# Altium PCB ArduinoUltrassonico.PcbDoc
Units mm, origin at the board's own origin, x right, y up, seen from the top; angles counter-clockwise.
Board outline 95.63 x 59.94 mm, 2 copper layers (Top Layer, Bottom Layer); 46 components, 40 nets, 151 pads, 8 vias.
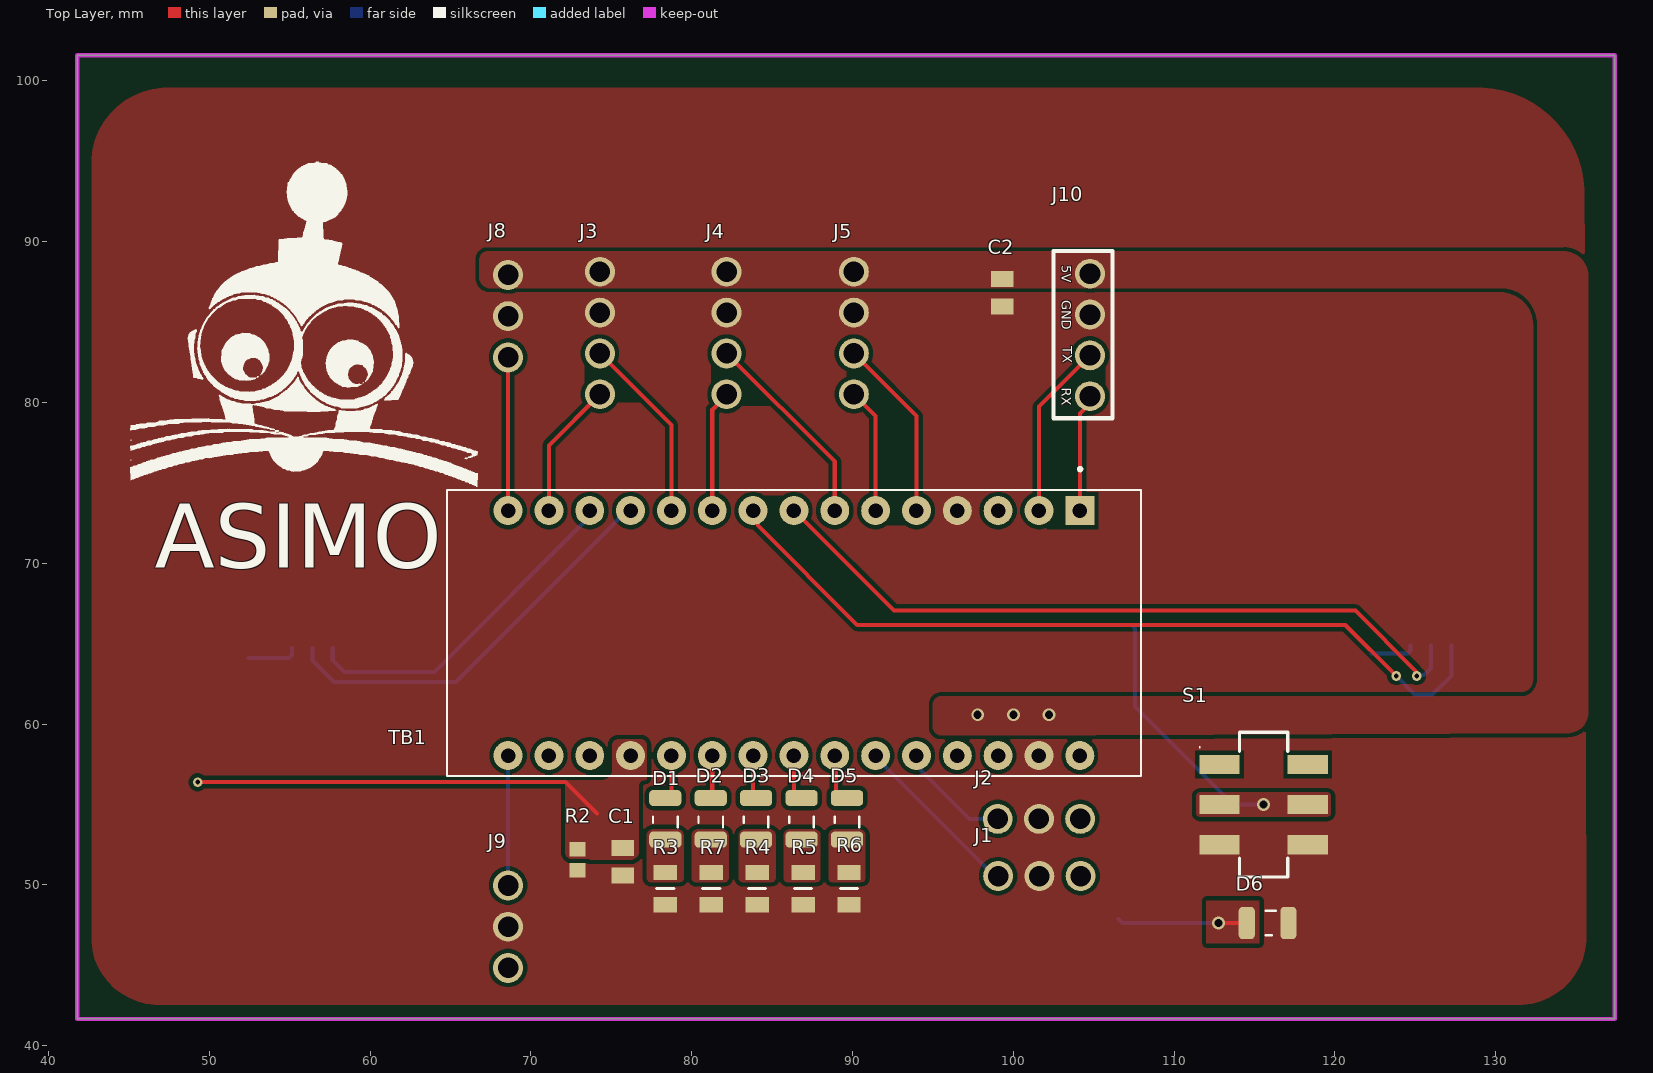
[diagram p0: Top Layer view]
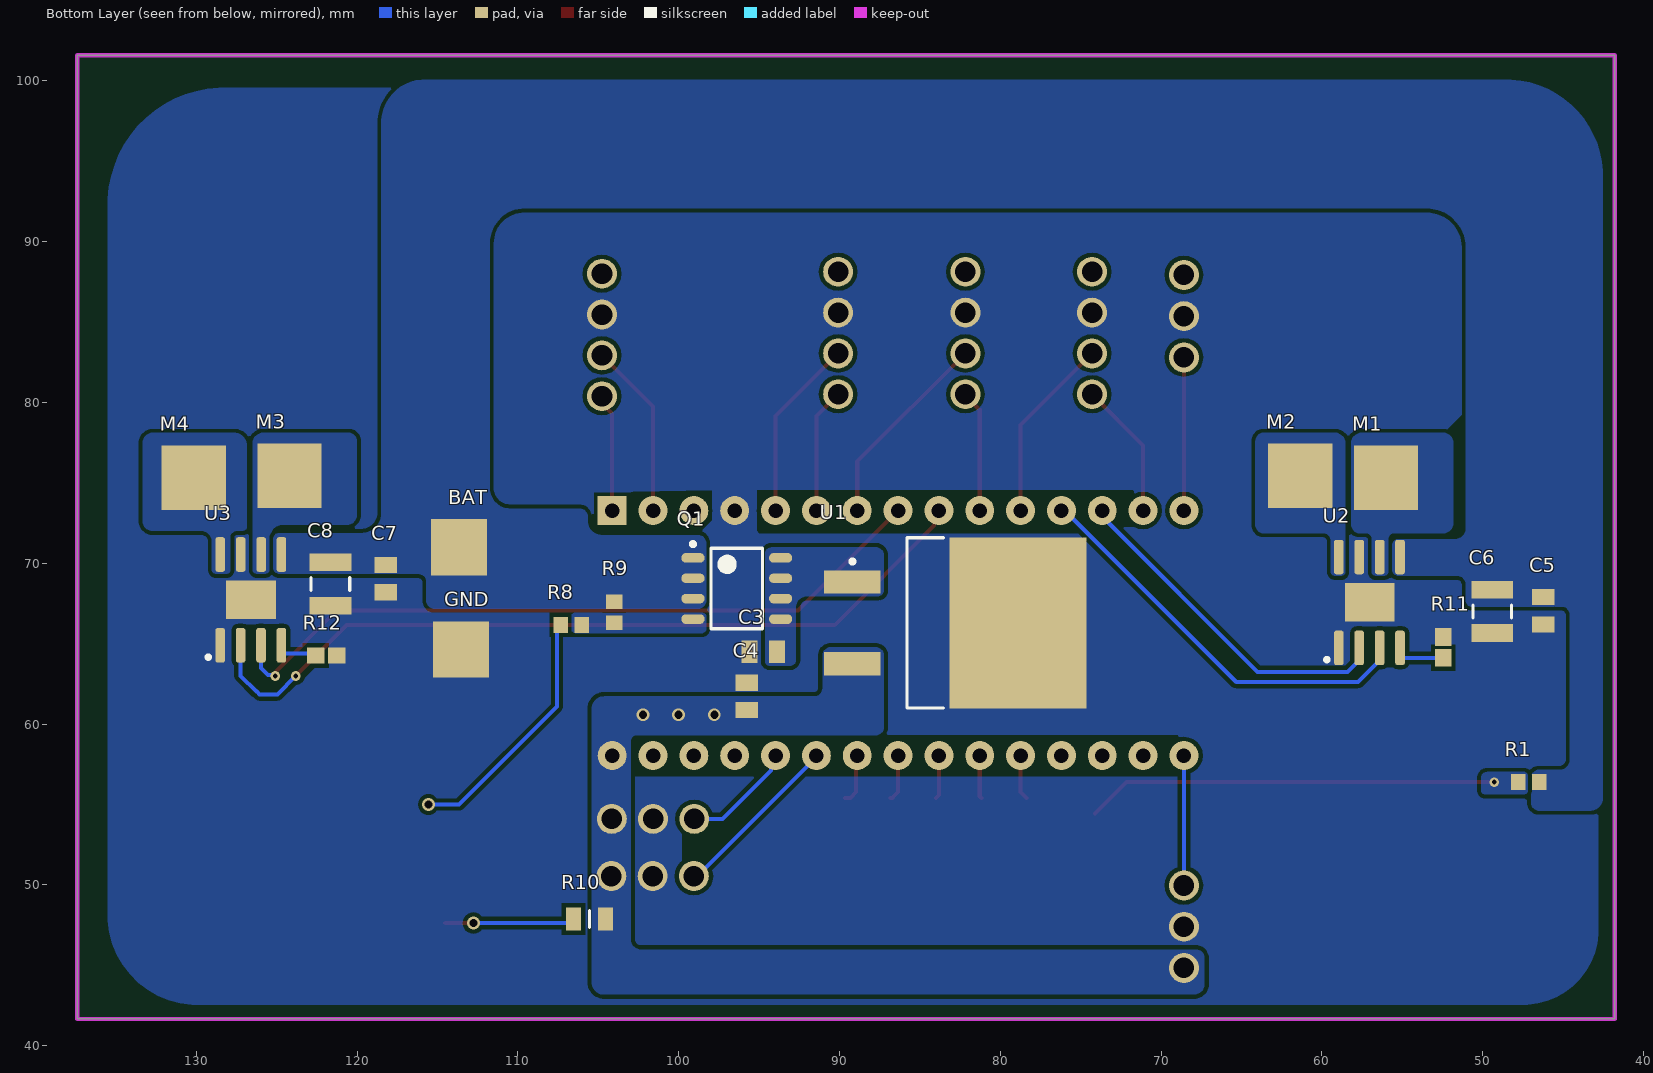
[diagram p1: Bottom Layer view, seen from below]
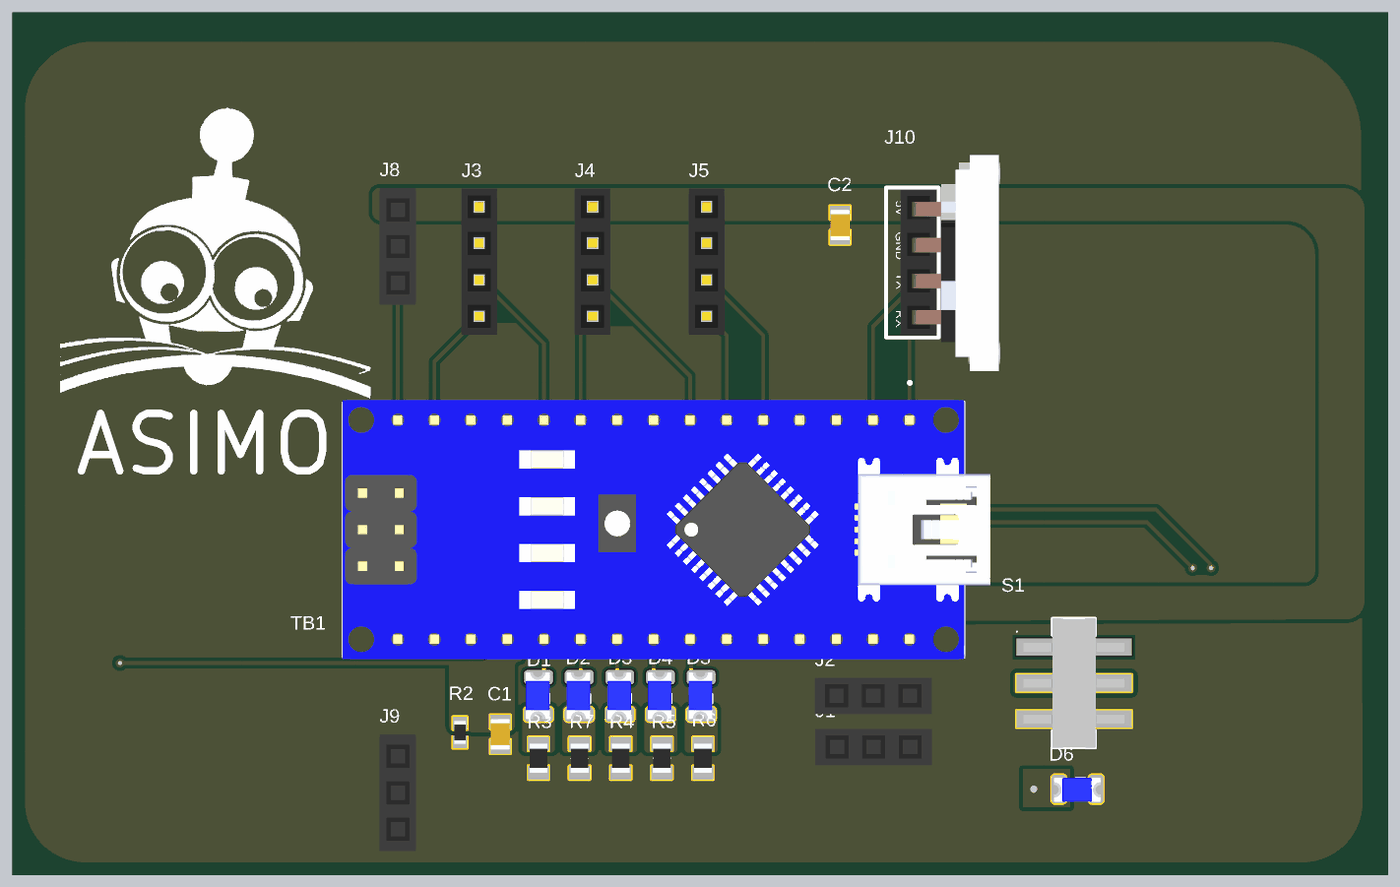
[diagram p2: 3D render of the assembled board from above, using the file's embedded part models]
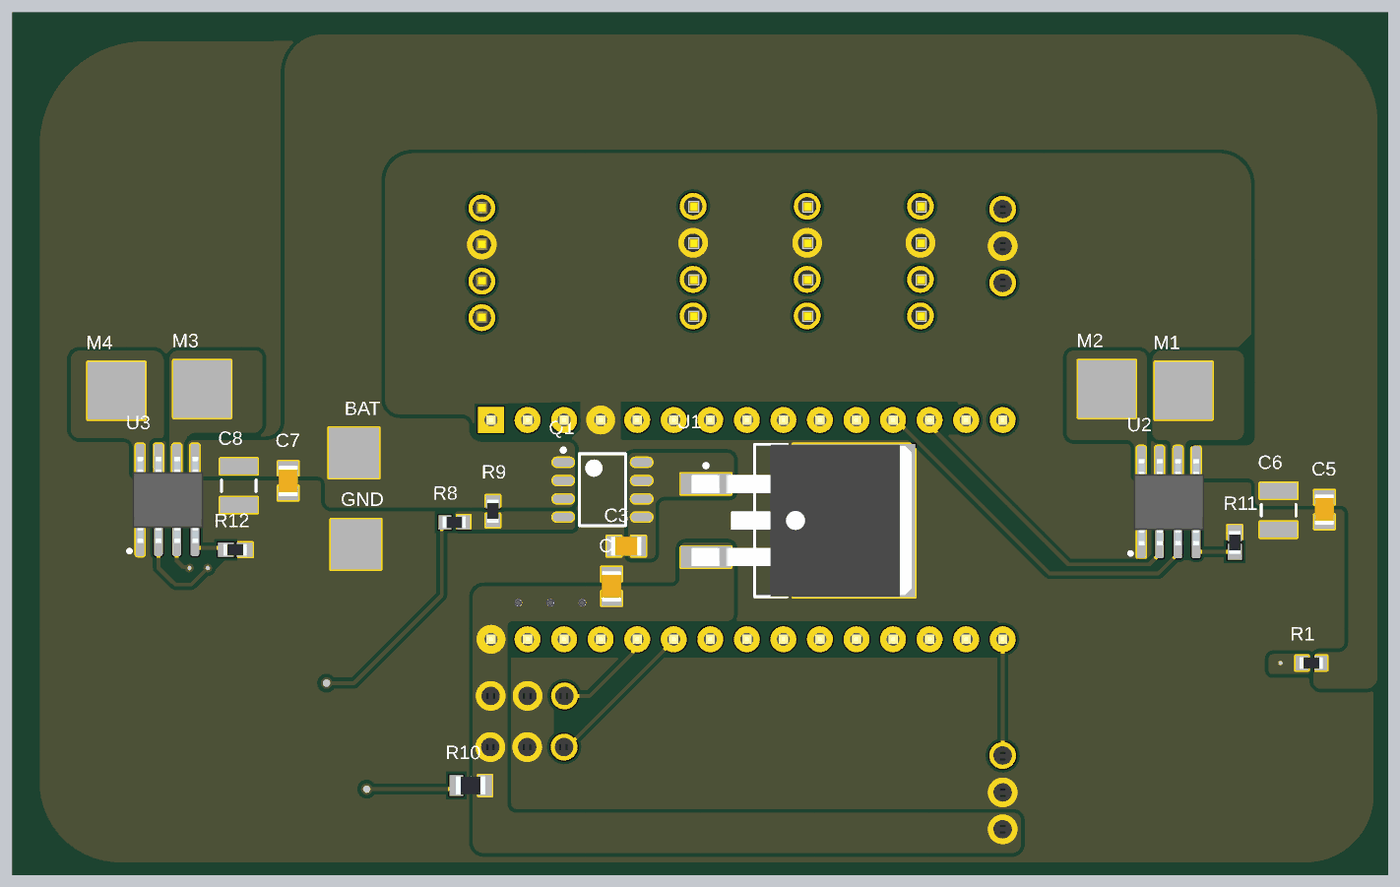
[diagram p3: 3D render of the assembled board from below, using the file's embedded part models]

## Layer stack, top to bottom
Top Solder: solder mask 0.0102, Solder Resist, Dk 3.5
Top Layer: signal copper 0.0356
Dielectric 1: dielectric 0.32, FR-4, Dk 4.8
Bottom Layer: signal copper 0.0356
Bottom Solder: solder mask 0.0102, Solder Resist, Dk 3.5

## Board outline
41.783,41.656 137.414,41.656 137.414,101.6 41.783,101.6

## Design rules (kind name [scope] priority, off if disabled: settings)
Clearance [All] p1: gap=0.254 ignorepadtopadclearanceinfootprint=FALSE except(0: Arc-Hole Track-Hole SMDPad-Hole THPad-Hole Via-Hole Fill-Hole Poly-Hole Region-Hole Text-Hole; 0.1: Arc-Arc Arc-Track Arc-SMDPad Track-Track Track-SMDPad SMDPad-SMDPad)
Height [All] p1: minheight=0 maxheight=1000 prefheight=12.7
PolygonConnect [All] p1: connectstyle=Direct reliefconductorwidth=0.254 reliefentries=4 polygonreliefangle="90 Angle" airgapwidth=0.254
RoutingVias [All] p1: holewidth=0.711 width=1.27 viastyle="Through Hole" minholewidth=0.711 minwidth=1.27 maxholewidth=0.711 maxwidth=1.27
SolderMaskExpansion [All] p1: expansion=0.102 istentingtop=FALSE
Width [All] p1: maxlimit=0.254 minlimit=0.254 preferedwidth=0.254
29 further rules are at their usual default settings.

## Classes and differential pairs
component class FontesLineares: BAT C3 C4 D6 GND Q1 R8 R9 R10 S1 U1
component class Driver2: C7 C8 M3 M4 R12 U3
component class Driver1: C5 C6 M1 M2 R11 U2
component class Controle: C1 C2 D1 D2 D3 D4 D5 J1 J2 J3 J4 J5 J8 J9 J10 R1 R2 R3 R4 R5 R6 R7 TB1

## Components (designator, comment, footprint, x,y, rotation, side; value= is the part's Value field where it differs from the comment)
BAT "Source Pad" PAD_ALIMENTAÇÃO_MINI 113.665,70.993 r0 top
C1 "100 nF" C0805 75.692,51.435 r90 top
C2 "0.1uF" C0805 99.306,86.829 r90 top
C3 "0.33 uF" C0805 94.742,64.516 r180 bottom
C4 "0.1uF" C0805 95.758,61.722 r270 bottom
C5 "0.1uF" C0805 46.228,67.056 r90 bottom
C6 "47uF" C1210 49.403,67.009 r90 bottom
C7 "0.1uF" C0805 118.245,69.049 r90 bottom
C8 "47uF" C1210 121.666,68.707 r90 bottom
D1 "Blue" DIODO_2-SMD-3215 78.359,54.102 r90 top
D2 "Blue" DIODO_2-SMD-3215 81.184,54.102 r90 top
D3 "Blue" DIODO_2-SMD-3215 84.01,54.102 r90 top
D4 "Blue" DIODO_2-SMD-3215 86.835,54.102 r90 top
D5 "Blue" DIODO_2-SMD-3215 89.66,54.102 r90 top
D6 "Blue" DIODO_2-SMD-3215 115.824,47.625 r180 top
GND "Ground Pad" PAD_ALIMENTAÇÃO_MINI 113.538,64.643 r0 top
J1 "Female Header 3" "FEMALE HEADER 3" 104.19,50.546 r180 top
J2 "Female Header 3" "FEMALE HEADER 3" 104.165,54.102 r180 top
J3 "Female Header 1x4" "Female Header 1x4" 74.12,84.963 r270 top
J4 "Female Header 1x4" "Female Header 1x4" 81.994,84.963 r270 top
J5 "Female Header 1x4" "Female Header 1x4" 89.916,84.963 r270 top
J8 "Female Header 3" "FEMALE HEADER 3" 68.58,82.804 r90 top
J9 "Female Header 3" "FEMALE HEADER 3" 68.58,44.831 r90 top
J10 "Bluetooth" BLUETOOTH 104.775,88.011 r270 top
M1 "Motor Pad" PAD_MOTOR_MINI 56.007,75.311 r180 bottom
M2 "Motor Pad" PAD_MOTOR_MINI 61.341,75.438 r180 bottom
M3 "Motor Pad" PAD_MOTOR_MINI 124.206,75.438 r180 bottom
M4 "Motor Pad" PAD_MOTOR_MINI 130.175,75.311 r180 bottom
Q1 "FDS6576" SOIC-8 96.393,68.434 r180 bottom
R1 "10kR" RESISTOR_0603 47.132,56.388 r180 bottom
R2 "3.3kR" RESISTOR_0603 72.898,51.562 r90 top
R3 "1.5 kR" RESISTOR_0805 78.359,49.768 r270 top
R4 "1.5 kR" RESISTOR_0805 84.074,49.768 r270 top
R5 "1.5 kR" RESISTOR_0805 86.931,49.768 r270 top
R6 "1.5 kR" RESISTOR_0805 89.789,49.768 r270 top
R7 "1.5 kR" RESISTOR_0805 81.216,49.768 r270 top
R8 "10kR" RESISTOR_0603 106.695,66.167 r180 bottom
R9 "10kR" RESISTOR_0603 104.013,66.944 r270 bottom
R10 "750R" RESISTOR_0805 105.553,47.879 r180 bottom
R11 "30kOhms" RESC1608X55N 52.451,64.77 r90 bottom
R12 "30kOhms" RESC1608X55N 121.92,64.262 r180 bottom
S1 "JS202011SCQN" DPDT 115.57,54.991 r270 top
TB1 "" SHIELD_ARDUINO_NANO 86.36,65.659 r270 top
U1 "L7805CD2T-TR" D2PAK 82.804,66.294 r180 bottom
U2 "DRV8871DDA" SO-PowerPad-8(8_pins) 57.023,67.564 r90 bottom
U3 "DRV8871DDA" SO-PowerPad-8(8_pins) 126.599,67.722 r90 bottom

## Footprints (in the part's own frame and the unit in brackets; to place one, negate y for a bottom-side part, rotate by r counter-clockwise, add the part's x,y. Pads: shape width x height; smd on the part's side, far side on the other; paste and mask are expansions set on the pad)
BLUETOOTH [mm]
  round 1.86 hole 1.28: GND(2.54,0) RX(7.62,0) TX(5.08,0) VCC(0,0)
  silkscreen extent -1.42,-2.26 8.99,1.4, body extent -3.67,-1.26 11.33,5.67, height 46
C0805 [mm]
  rect 1x1.4 smd: 1(-0.85,-0.008) 2(0.85,-0.008)
  body extent -1.07,-0.68 1.07,0.67, height 0.9
C1210 [mm] "Chip Capacitor, Body 3.2x2.5mm, IPC High Density"
  rect 1.1x2.6 smd: 1(-1.35,0) 2(1.35,0)
  silkscreen extent -0.4,-1.2 0.4,1.2, body extent -1.7,-1.35 1.7,1.35, height 1.3
D2PAK [mm] "D2-PAK, 3-Pads, Body 7,60x8,64mm (max), IPC Medium Density"
  rect 3.5x1.45 smd: 1(-6.4,2.54) 3(-6.4,-2.54)
  rect 8.5x10.65 smd: 2(3.9,0)
  silkscreen extent -6.53,-5.3 -0.75,5.3, body extent -7.41,-5.28 7.89,5.28, height 4.81
DIODO_2-SMD-3215 [mm]
  rrect50% 1x2 smd: A(1.3,0) C(-1.288,-0.001)
  silkscreen extent -0.51,-0.76 0.13,0.76, body extent -1.61,-0.77 1.66,0.87, height 0.9
DPDT [mm]
  rect 1.2x2.5 smd: A1(0,2.75) A1(0,-2.75) A2(-2.5,2.75) A2(-2.5,-2.75) A3(2.5,2.75) A3(2.5,-2.75)
  silkscreen extent -4.5,-4 4.5,1.5, body extent -4.5,-3.5 4.5,3.5, height 5.65
"Female Header 1x4" [mm]
  round 1.86 hole 1.28: PIN1(-3.17,0.175) PIN2(-0.63,0.175) PIN3(1.91,0.175) PIN4(4.45,0.175)
  body extent -4.41,-1.13 5.75,1.38, height 8.4
"FEMALE HEADER 3" [mm]
  round 1.86 hole 1.28: PIN1(0,0) PIN2(2.565,0) PIN3(5.13,0)
  body extent -1.52,-1.27 6.6,1.27, height 8.5
PAD_ALIMENTAÇÃO_MINI [mm]
  rect 3.5x3.5 smd far side: A(0,0)
PAD_MOTOR_MINI [mm]
  rect 4x4 smd: M(0,0)
RESC1608X55N [mm]
  rect 1.1x1 smd: 1(-0.65,0) 2(0.65,0)
  body extent -0.8,-0.4 0.8,0.4, height 0.55
RESISTOR_0603 [mm]
  rect 0.9x1 smd: 1(-0.65,0) 2(0.65,0)
  body extent -0.8,-0.4 0.8,0.4, height 0.55
RESISTOR_0805 [mm]
  rect 0.95x1.45 smd: 1(-1,0) 2(1,0)
  silkscreen extent 0,-0.53 0,0.53, body extent -1.02,-0.63 1.02,0.63, height 0.5
SHIELD_ARDUINO_NANO [mm]
  rect 1.8x1.8 / inner round 1.8 / far side rect 1.8x1.8 hole 0.9: 1(-7.62,17.78)
  round 1.8 hole 0.9: 2(-7.62,15.24) 3(-7.62,12.7) 4(-7.62,10.16) 5(-7.62,7.62) 6(-7.62,5.08) 7(-7.62,2.54) 8(-7.62,0) 9(-7.62,-2.54) 10(-7.62,-5.08) 11(-7.62,-7.62) 12(-7.62,-10.16) 13(-7.62,-12.7) 14(-7.62,-15.24) 15(-7.62,-17.78) 16(7.62,-17.78) 17(7.62,-15.24) 18(7.62,-12.7) 19(7.62,-10.16) 20(7.62,-7.62) 21(7.62,-5.08) 22(7.62,-2.54) 23(7.62,0) 24(7.62,2.54) 25(7.62,5.08) 26(7.62,7.62) 27(7.62,10.16) 28(7.62,12.7) 29(7.62,15.24) 30(7.62,17.78)
  silkscreen extent -10.3,-21.59 8.89,21.59, body extent -9,-21.6 9,23.4, height 12.6
SO-PowerPad-8(8_pins) [mm]
  rrect50% 2.15x0.6 smd: 1(-2.825,1.925) 2(-2.825,0.655) 3(-2.825,-0.615) 4(-2.825,-1.885) 5(2.825,-1.885) 6(2.825,-0.625) 7(2.825,0.65) 8(2.825,1.925)
  rect 2.4x3.1 smd: 9(0,0)
  silkscreen extent -3.66,2.57 -3.45,2.77, body extent -3,-2.45 3,2.45, height 1.7
SOIC-8 [mm] "SOIC, 8-Leads, Body 4,90x3,90mm, Pitch 1,27mm, IPC Medium Density"
  oval 1.45x0.6 smd: D(2.725,-1.905) D(2.725,-0.635) D(2.725,0.635) D(2.725,1.905) G(-2.725,-1.905) S(-2.725,-0.635) S(-2.725,0.635) S(-2.725,1.905)
  silkscreen extent -2.85,-2.5 1.6,2.88, body extent -2,-2.5 2,2.5, height 1.75

## Part data
BAT: library part "Source Pad Mini Sumô", "VCC PAD MINI SUMÔ", Cable AWG="20 / 18 (AWG)", Library Ref=Pads, Recomended Category="Mini Sumô", Size="3.5 x 3.5 (mm)"
C1: library part 885012207128, "CAP CER 100 nF 100V X7R 0805", Manufacturer="Wurth Elektronik", Operating Temperature="-55°C ~125ºC", Package / Case="0805(2012 Metric)", Supplier Part Number 1=710-885012207128, Tolerance=10%, Voltage - Rated="100 VDC", Category="Ceramic capacitor", ComponentLink1Description=Datasheet, ComponentLink1URL=https://br.mouser.com/datasheet/2/445/885012207128-1727772.pdf, ComponentLink2Description="Mouser Link", ComponentLink2URL=https://br.mouser.com/ProductDetail/Wurth-Elektronik/885012207128?qs=MLItCLRbWsys1TnbPEYt%252BQ%3D%3D, Dieletric=X7R, ESR=-, Library Control - Checked Footprint=Yes, Library Control - Checked Schematic=Yes, Library Ref=Capacitor, Part Number=885012207128, Price="1=0,41 10=0,283 100=0,169 1000=0,107 (USD)", Size / Dimension="2 mm L  x 1.25 mm W x 1.25 mm H", Supplier 1=Mouser
C2 C4: library part C0805C104M3RACTU, "CAP CER 0.1uF 25V X7R 0805", Manufacturer=Kemet, Operating Temperature="-55 C ~ 125 C", Package / Case="0805(2012 mestric)", Supplier Part Number 1=80-C0805C104M3R, Tolerance=20%, Voltage - Rated="25 VDC", Category="Ceramic Capacitor", ComponentLink1Description=Datasheet, ComponentLink1URL=https://br.mouser.com/datasheet/2/212/KEM_C1002_X7R_SMD-1102033.pdf, ComponentLink2Description="Mouser Link", ComponentLink2URL=https://br.mouser.com/ProductDetail/KEMET/C0805C104M3RACTU?qs=jbCUrP3sAgSIdMuvv9W4Pg%3D%3D, Dieletric=X7R, ESR=-, Library Control - Checked Footprint=No, Library Control - Checked Schematic=Yes, Library Control - Last Update="26/06/2021 20:52", Library Control - Person that Checked Schematic=Guilherme, Library Control - Person that did the Last Update Schematic=Marcos, Library Ref=Capacitor, Part Number=C0805C104M3RACTU, Price="1=0,13 10=0,064 100=0,037 1000=0,025 (USD)", Size / Dimension="1.25 mm W x 2 mm L x 0.78 mm H", Supplier 1=Mouser
C3: library part GCM21BR71E334KA37K, "CAP CER 0.33UF 25V X7R 0805", Manufacturer="Murata Eletronics", Operating Temperature="-55 C ~ 125 C", Package / Case="0805 (2012 Metric)", Supplier Part Number 1=81-GCM21BR71E334KA7K, Tolerance=10%, Voltage - Rated="25 VDC", Category="Ceramic Capacitor", ComponentLink1Description=Datasheet, ComponentLink1URL=https://br.mouser.com/datasheet/2/281/GCM21BR71E334KA37_01-1968656.pdf, ComponentLink2Description="Mouser Link", ComponentLink2URL=https://br.mouser.com/ProductDetail/Murata-Electronics/GCM21BR71E334KA37K?qs=N3Kl9KD794Tg%2FXM5q2uFQQ%3D%3D, ComponentLink3Description=ESR, ComponentLink3URL=https://www.murata.com/en-us/products/productdetail?partno=GCM21BR71E334KA37%23, Dieletric=X7R, Library Control - Checked Footprint=Yes, Library Control - Checked Schematic=Yes, Library Control - Last Update="28/06/2021 00:57", Library Control - Person that Checked Footprint=Nikaum, Library Control - Person that Checked Schematic=Nikaum, Library Control - Person that did the Last Update Footprint=Nikaum, Library Control - Person that did the Last Update Schematic=Nikaum, Library Ref=Capacitor, Part Number=GCM21BR71E334KA37K, Price="1= 0,57, 10= 0,398, 100= 0,239 (USD)", Size / Dimension="2,00 L x 1,25 W x 1,25 H", Supplier 1=Mouser
C5 C7: library part C0805C104M3RACTU, "CAP CER 100nF 25V X7R 0805", Manufacturer=Kemet, Operating Temperature="-55 C ~ 125 C", Package / Case="0805(2012 mestric)", Supplier Part Number 1=80-C0805C104M3R, Tolerance=20%, Voltage - Rated="25 VDC", Category="Ceramic Capacitor", ComponentLink1Description=Datasheet, ComponentLink1URL=https://br.mouser.com/datasheet/2/212/KEM_C1002_X7R_SMD-1102033.pdf, ComponentLink2Description="Mouser Link", ComponentLink2URL=https://br.mouser.com/ProductDetail/KEMET/C0805C104M3RACTU?qs=jbCUrP3sAgSIdMuvv9W4Pg%3D%3D, Dieletric=X7R, ESR=-, Library Control - Checked Footprint=Yes, Library Control - Checked Schematic=Yes, Library Control - Last Update=25/08/22, Library Control - Person that Checked Footprint=Cage, Library Control - Person that Checked Schematic=Cage, Library Control - Person that did the Last Update Footprint=Cage, Library Control - Person that did the Last Update Schematic=Cage, Library Ref=Capacitor, Part Number=C0805C104M3RACTU, Price="1=0,13 10=0,064 100=0,037 1000=0,025 (USD)", Size / Dimension="1.25 mm W x 2 mm L x 0.78 mm H", Supplier 1=Mouser
C6 C8: library part GRM32EC81C476KE15K, "CAP CER 47uF 16V X6S 1210", Manufacturer=Murata, Operating Temperature="-55°C ~ 105°C", Package / Case="1210 (3225 metric)", Supplier Part Number 1=81-GRM32EC81C476KE5K, Tolerance=10%, Voltage - Rated=16V, Category="Ceramic Capacitor", ComponentLink1Description=Datasheet, ComponentLink1URL=https://br.mouser.com/datasheet/2/281/1/GRM32EC81C476KE15_01A-1988154.pdf, ComponentLink2Description="Mouser Link", ComponentLink2URL=https://br.mouser.com/ProductDetail/Murata-Electronics/GRM32EC81C476KE15K?qs=pba5EUA0Y0ZfNhWUOosFbg%3D%3D, Dieletric=X6S, ESR=-, Library Control - Checked Footprint=Yes, Library Control - Checked Schematic=Yes, Library Control - Last Update=22/08/22, Library Control - Person that Checked Footprint=Cage, Library Control - Person that Checked Schematic=Cage, Library Control - Person that did the Last Update Footprint=Prisma, Library Control - Person that did the Last Update Schematic=Prisma, Library Ref=Capacitor, Part Number=GRM32EC81C476KE15K, Price="1=0,59 10=0,314 100=0,274 (USD)", Size / Dimension="3.2mm x 2.5mm x 2.5mm", Supplier 1=Mouser
D1 D2 D3 D4 D5 D6: library part EAST3215BA5, "LED 75mW BLUE 45MCD 3215", Current - Forward (If)="20 mA", Manufacturer="Everlight Electronics", Max Power Dissipation="75 mW", Operating Temperature="- 40 °C ~ 85 °C", Package / Case=3215, Reverse Voltage="5 V", Supplier Part Number 1=638-EAST3215BA5, Voltage - Forward (Vf)="3,30 V", Category="Standard LEDs - SMD", Color=Blue, ComponentLink1Description="Mouser Link", ComponentLink1URL=https://www.mouser.com/ProductDetail/Everlight/EAST3215BA5?qs=Cqqh%252BS766wnzp9nQVj5A4g==, ComponentLink2Description=Datasheet, ComponentLink2URL=https://www.mouser.com/datasheet/2/143/EAST3215BA5-1154292.pdf, Library Control - Checked Footprint=yes, Library Control - Checked Schematic=yes, Library Control - Last Update="13/06/2021 12:45", Library Control - Person that Checked Footprint=Lucas, Library Control - Person that Checked Schematic=Lucas, Library Control - Person that did the Last Update Footprint="Stéfany (Ster)", Library Control - Person that did the Last Update Schematic="Stéfany (Ster)", Library Ref=Diodo/Led, Luminous Intensity="45 mcd", Max Current Rating="20 mA", Part Number=EAST3215BA5, Price="1 = 0,3800, 10 = 0,2050, 100 = 0.1080 (USD)", Supplier 1=Mouser, Viewing Angle=130°, Wavelength="468 nm"
GND: library part "Ground Pad Mini Sumô", "GND PAD MINI SUMÔ", Cable AWG="20 / 18 (AWG)", Library Ref=Pads, Recomended Category="Mini Sumô", Size="3.5 x 3.5 (mm)"
J10: library part "Barramento Bluetooth", "BARRAMENTO BLUETOOTH HC-06", Frequency="2,4 GHz", Operating Voltage="3,6 / 6 (V)", Recomended Operating Configuration="5V @ 50mA", Bluetooth Mode="Slave Only", Library Ref=Header, Max Range=10m, Maximum Serial Transmission Rate="9600 bps", Modulation="GFSK (Gaussian Frequency Shift Keying)", Number of Contacts=4
M1 M2 M3 M4: library part "Motor Pad Mini Sumô", "MOTOR PAD MINI SUMÔ", Cable AWG="20 / 18 (AWG)", Library Ref=Pads, Recomended Category="Mini Sumô", Size="3.5 x 3.5 (mm)"
Q1: "MOSFET P-CH 20V 11A SOIC-8", Current - Continuous Drain (Id) @25°C=-11A, Drain to Source Voltage (Vds)=-20V, Drive Voltage (Max Rds On, Min Rds On)="-2.5V ~4.5V", Input Capacitance (Ciss) (Max) @Vds=4044pF@-10V, Manufacturer="onsemi / Fairchild", Operating Temperature="-55 °C ~150 °C", Package / Case=SOIC-8, Power Dissipation (Max)=2.5W, Supplier Part Number 1=512-FDS6576, ComponentLink1Description=Datasheet, ComponentLink1URL=https://br.mouser.com/datasheet/2/308/1/FDS6576_D-1808687.pdf, ComponentLink2Description=Mouser, ComponentLink2URL=https://br.mouser.com/ProductDetail/onsemi-Fairchild/FDS6576?qs=FOlmdCx%252BAA1N14vq5QZP7Q%3D%3D, FET Type=P-Channel, Gate Charge (Qg) (Max) @ Vgs=60nC@-4.5V, Library Ref=Mosfet, Part Number=SOIC-8, Price="1=1.34, 10=1.20, 100=0.932, 500=0.77, 1000=0.608 (USD)", Rds On (Max) @ Id, Vgs="23mOhms @ -11A, -4.5V", Rise / Fall Time (Typ)="17 / 79 (ns)", Supplier 1=Mouser, Vgs (Max)=12V, Vgs(th) (Max) Id=-1.5V@-250uA
R1 R8 R9: library part RC0603JR-0710KL, "RES SMD 10K OHM 5% 1/10W 0603", Manufacturer=Yageo, Operating Temperature="- 55ºC ~ 155ºC", Package / Case="0603 (1608 Metric)", Power Rating="100 mW (1/10 W)", Resistor Type=Fixo, Supplier Part Number 1=603-RC0603JR-0710KL, Temperature Coefficient="100 PPM / C", Tolerance="5 %", Voltage Rating="75 V", Category="Thick Film Resistors - SMD", ComponentLink1Description="Mouser Link", ComponentLink1URL=https://br.mouser.com/ProductDetail/Yageo/RC0603JR-0710KL?qs=ksOUTF%2FWcd8D6T22BJkQ7g%3D%3D, ComponentLink2Description="Datsheet Link", ComponentLink2URL=https://br.mouser.com/datasheet/2/447/Yageo_03_18_2021_PYu_RC_Group_51_RoHS_L_11-2199992.pdf, Library Control - Checked Footprint=No, Library Control - Checked Schematic=Yes, Library Control - Last Update="21/06/21 14:15", Library Control - Person that Checked Schematic=Marcos, Library Control - Person that did the Last Update Footprint=Dalarme, Library Control - Person that did the Last Update Schematic=Marcos, Library Ref=Resistor, Part Number=RC0603JR-0710KL, Price="1=0,10, 10=0,015, 100=0,005 1000=0,0040 (USD)", Size / Dimension="1.6 mm L x  0.8 mm W x  0.45 mm H", Supplier 1=Mouser
R2: library part CRGCQ0603F3K3, "RES SMD 3.3K OHM 1% 1/10W 0603", Manufacturer="TE Connectivity / Holsworthy", Operating Temperature="- 55ºC ~ 125ºC", Package / Case="0603 (1608 Metric)", Power Rating="100 mW (1/10 W)", Resistor Type=Fixed, Supplier Part Number 1=279-CRGCQ0603F3K3, Temperature Coefficient="100 PPM / C", Tolerance="1 %", Voltage Rating="75 V", Category="Thick Film Resistors", ComponentLink1Description="Mouser Link", ComponentLink1URL=https://br.mouser.com/ProductDetail/TE-Connectivity-Holsworthy/CRGCQ0603F3K3?qs=sGAEpiMZZMvdGkrng054t7z4BkURc4Lz7mzhBruKq8fwVJ16OlxZFQ%3D%3D, ComponentLink2Description=Datasheet, ComponentLink2URL=https://br.mouser.com/datasheet/2/418/4/NG_DS_1773204-3_1-1358553.pdf, Library Control - Checked Footprint=Yes, Library Control - Checked Schematic=Yes, Library Control - Last Update="27/06/2021 20:27", Library Control - Person that Checked Footprint=Nikaum, Library Control - Person that Checked Schematic=Guilherme, Library Control - Person that did the Last Update Footprint=Dalarme, Library Control - Person that did the Last Update Schematic=Dalarme, Library Ref=Resistor, Part Number=CRGCQ0603F3K3, Price="1=0,10, 10=0,029, 100=0,011 (USD)", Size / Dimension="1.6 mm L x  0.8 mm W x  0.45 mm H", Supplier 1=Mouser
R3 R4 R5 R6 R7: library part CRCW08051K50FKEAC, "RES SMD 1.5K OHM 1% 1/8W 0805", Manufacturer="Vishay / Dale", Operating Temperature="-55 C ~ 155 C", Package / Case="0805 (2012 Metric)", Power Rating="125 mW (1/8 W)", Resistor Type=Fixo, Supplier Part Number 1=71-CRCW08051K50FKEAC, Temperature Coefficient="100 PPM / C", Tolerance="1 %", Voltage Rating="150 V", Category="Thick Film Resistors - SMD", ComponentLink1Description="Mouser Link", ComponentLink1URL=https://br.mouser.com/ProductDetail/Vishay-Dale/CRCW08051K50FKEAC?qs=E3Y5ESvWgWMwo6R2oqPQ9Q%3D%3D, ComponentLink2Description=Datasheet, ComponentLink2URL=https://br.mouser.com/datasheet/2/427/crcwce3-1762584.pdf, Library Control - Checked Footprint=Yes, Library Control - Checked Schematic=Yes, Library Control - Last Update="27/06/2021 20:45", Library Control - Person that Checked Footprint=Nikaum, Library Control - Person that Checked Schematic=Nikaum, Library Control - Person that did the Last Update Footprint=Nicolas, Library Control - Person that did the Last Update Schematic=Nikaum, Library Ref=Resistor, Part Number=CRCW08051K50FKEAC, Price="1=0,10, 10=0,059, 100=0,024 (USD)", Size / Dimension="2,00 L x 1,25 W x 0,45 H", Supplier 1=Mouser
R10: library part ERJ-6GEYJ751V, "RES SMD 750 OHM 5% 1/8W 0805", Manufacturer=Panasonic, Operating Temperature="- 55ºC ~ 155ºC", Package / Case="0805 (2012 Metric)", Power Rating="125 mW (1/8 W)", Resistor Type=Fixed, Supplier Part Number 1=667-ERJ-6GEYJ751V, Temperature Coefficient="200 PPM / C", Tolerance="5 %", Voltage Rating="150 V", Category="Thick Film Resistors - SMD", ComponentLink1Description="Mouser Link", ComponentLink1URL=https://br.mouser.com/ProductDetail/Panasonic/ERJ-6GEYJ751V?qs=sGAEpiMZZMukHu%252BjC5l7YYjpZ9X9PhOCxoCk8Svj5Vk%3D, ComponentLink2Description=Datasheet, ComponentLink2URL=https://br.mouser.com/datasheet/2/315/AOA0000C301-1488782.pdf, Library Control - Checked Footprint=Yes, Library Control - Checked Schematic=Yes, Library Control - Last Update="27/06/2021 20:29", Library Control - Person that Checked Footprint=Nikaum, Library Control - Person that Checked Schematic=Guilherme, Library Control - Person that did the Last Update Footprint=Dalarme, Library Control - Person that did the Last Update Schematic=Nikaum, Library Ref=Resistor, Part Number=ERJ-6GEYJ751V, Price="1=0,10, 10=0,055, 100=0,021 (USD)", Size / Dimension="2 mm L x  1.25 mm W x  0.6 mm H", Supplier 1=Mouser
R11 R12: library part RC0603FR-0730KL, "RES SMD 30 kOHMS 1% 1/10W 0603", Manufacturer=YAGEO, Operating Temperature="- 55°C ~ 155°C", Package / Case="0603 (1608 Metric)", Power Rating="100 mW (1/10 W)", Resistor Type=Fixo, Supplier Part Number 1=603-RC0603FR-0730KL, Temperature Coefficient="100 PPM / C", Tolerance="1 %", Voltage Rating="50 V", Category="Thick Film Resistors - SMD", ComponentLink1Description="Mouser Link", ComponentLink1URL=https://br.mouser.com/ProductDetail/YAGEO/RC0603FR-0730KL?qs=diQw95jMAeNFr44yr782FQ%3D%3D, ComponentLink2Description=Datasheet, ComponentLink2URL=https://br.mouser.com/datasheet/2/447/Yageo_03_18_2021_PYu_RC_Group_51_RoHS_L_11-2199992.pdf, Library Control - Checked Footprint=Yes, Library Control - Checked Schematic=Yes, Library Control - Last Update="24/07/2021 11:34", Library Control - Person that Checked Footprint=Guilherme, Library Control - Person that Checked Schematic=Guilherme, Library Control - Person that did the Last Update Footprint=Guilherme, Library Control - Person that did the Last Update Schematic=Guilherme, Library Ref=Resistor, Part Number=RC0603FR-0730KL, Price="1=0,10, 10=0,024, 100=0,01(USD)", Size / Dimension="1,6 L x 0,8 W x 0,45 H", Supplier 1=Mouser
S1: "DEEP SWITCH 4 POSITIONS", Current Rating="300 mA", Manufacturer=C&K, Mouser Part Number=611-JS202011SCQN, Operating Temperature(max - min)=-20~70°C, Voltage Rating DC="30 VDC", ComponentLink1Description="Mouser Link", ComponentLink1URL=https://br.mouser.com/ProductDetail/CK/JS202011SCQN?qs=LgMIjt8LuD95JYWxZ7NvZA%3D%3D, ComponentLink2Description="Datasheet Link", ComponentLink2URL=https://www.mouser.com/datasheet/2/60/js-1841892.pdf, Library Control - Checked Footprint=Yes, Library Control - Checked Schematic=Yes, Library Control - Last Update=15/06/2021, Library Control - Person that Checked Footprint=Nikaum, Library Control - Person that Checked Schematic=Nikaum, Library Control - Person that did the Last Update Footprint=Nikaum, Library Control - Person that did the Last Update Schematic=Nikaum, Library Ref=Diversos, Part Number=JS202011SCQN, Supplier=Mouser, Switch Function="ON - ON"
TB1: library part ARDUINO_NANO, "Small, complete, and breadboard-friendly board based on the ATmega328 (Arduino Nano 3.x)", Package="Non-Standard Arduino", Availability="Not in stock", Check_prices=https://www.snapeda.com/parts/Arduino%20Nano/Arduino/view-part/?ref=eda, MF=Arduino, MP="Arduino Nano", Price=None, SnapEDA_Link=https://www.snapeda.com/parts/Arduino%20Nano/Arduino/view-part/?ref=snap
U1: "IC REG LINEAR 5V 1A D2PAK", Current - Output=1A, Current - Quiescent (Iq)=8mA, Manufacturer=ST, Max Power Dissipation="Internally Limited", Operating Temperature="-40~125 ºC", Package/ Case=D2PAK, Supplier Part Number 1=511-L7805CD2T-TR, Voltage - Dropout (Max)=2V, Voltage - Input (Max)=35V, Voltage - Output (Max)=5.25V, Voltage - Output (Min/Fixed)=5V, Category="Linear Voltage Regulator", ComponentLink1Description="Mouser Link", ComponentLink1URL=https://br.mouser.com/ProductDetail/STMicroelectronics/L7805CD2T-TR?qs=%2Fha2pyFadujE9KQ1BxQHaLKqcK8XYkwQA8UfL%2FIGb8dfQq%2Fq%2FT%2Fjqg%3D%3D, ComponentLink2Description=Datasheet, ComponentLink2URL=https://br.mouser.com/datasheet/2/389/cd00000444-1795274.pdf, Library Control - Checked Footprint=Yes, Library Control - Checked Schematic=Yes, Library Control - Last Update=25/06/21, Library Control - Person that Checked Footprint=Nícolas, Library Control - Person that Checked Schematic=Nícolas, Library Control - Person that did the Last Update Schematic=Nícolas, Library Ref="Voltage Regulator", Number of Regulators=1, Output Type=Fixed, Part Number=L7805CD2T-TR, Power Dissipation="Internally Limited", Price="1=0,93, 10=0,83, 100=0,79 (USD)", Supplier 1=Mouser
U2 U3: "IC MTR DRV (6.5V ~ 45V) (3.5 A) SO-PowerPad-8", Current - Output=3.5A, Current - Peak Output (Source, Sink)="3.6A / 3.6A", Logic Voltage - VIL, VIH="VIL=0.5V / VIH=1.5V", Manufacturer="Texas Instruments", Operating Supply Current=3mA, Operating Temperature="-40°C ~ 125°C", Package / Case=SO-PowerPad-8, Power Dissipation="Irms^2 (HighSide Rds(On) + LowSide Rds(On))", Rds On - Drain-Source Resistance="565m ohm", Suplier Part Number 1=595-DRV8871DDA, Voltage - Load="(6.5V ~ 45V)", Category=Driver, ComponentLink1Description="Mouser Link / ST Link", ComponentLink1URL=https://br.mouser.com/ProductDetail/Texas-Instruments/DRV8871DDA?qs=Fobv33ltQGiluwfB07aSBw%3D%3D, ComponentLink2Description=Datasheet, ComponentLink2URL=https://www.ti.com/lit/ds/symlink/drv8871.pdf?HQS=dis-mous-null-mousermode-dsf-pf-null-wwe&ts=1623013148488&ref_url=https%253A%252F%252Fwww.google.com%252F, Library Control - Checked Footprint=Yes, Library Control - Checked Schematic=Yes, Library Control - Last Update="12/06/2021 17:04", Library Control - Person that Checked Footprint="Stéfany (Ster)", Library Control - Person that Checked Schematic="Stéfany (Ster)", Library Control - Person that did the Last Update Footprint="Maria Laura", Library Control - Person that did the Last Update Schematic="Stéfany (Ster)", Library Ref=Driver, Logic (IN-SD/High Low)=IN-SD, Output Configuration="Half Bridge (2)", Part Number=DRV8871DDA, Price="1=3,15000, 10=2,84000, 100=2,31000 (USD)", Supplier 1=Mouser, Technology="Power MOSFET", Voltage - Supply="(6.5V ~ 45V)"
J1 J2 J8 J9: Library Ref=Header, Number of Contacts=3, System=Connector

## Via types
v1: diameter 0.8, hole 0.5, Top Layer to Bottom Layer, tented both sides, 5 vias
v2: diameter 0.6, hole 0.3, Top Layer to Bottom Layer, tented both sides, 3 vias

## Nets (pads, with @x,y where several pads share a name; then routed paths per layer and width w, separated by ;. In a path a pad name is that pad's centre, name@x,y a point inside that pad or via, vN(x,y) a via of type N, cw(c..) or ccw(c..) an arc to the next point about the centre after c; other vN are vias at no path point)
1ILIM: R11.1 U2.4 | length 3.2
  Bottom Layer w0.254: R11.1 54.967,64.12 55.138,64.291 U2.4
2ILIM: R12.1 U3.4 | length 2.8
  Bottom Layer w0.254: R12.1@122.301,64.389 124.543,64.389 124.714,64.56 U3.4
5V: C2.2 C4.2 J1.PIN1 J2.PIN1 J3.PIN1 J4.PIN1 J5.PIN1 J8.PIN3 J9.PIN1 J10.VCC R10.2 TB1.30 U1.3
  other v1: 97.79,60.579 100.013,60.579 102.235,60.579
BAT: BAT.A C5.2 C6.2 C7.2 C8.2 Q1.S R1.2 R9.1 U2.5 U3.5
BLUETOOTHRX: J10.RX TB1.1 | length 7.4
  Top Layer w0.254: TB1.1 104.14,79.321 104.775,79.956 J10.RX
BLUETOOTHTX: J10.TX TB1.2 | length 11
  Top Layer w0.254: TB1.2 101.6,79.756 J10.TX
Echo1: J3.PIN4 TB1.14 | length 8.5
  Top Layer w0.254: TB1.14 71.12,77.338 J3.PIN4
Echo2: J4.PIN4 TB1.10 | length 7.6
  Top Layer w0.254: TB1.10 81.28,79.548 82.169,80.437 J4.PIN4
Echo3: J5.PIN4 TB1.6 | length 7.8
  Top Layer w0.254: J5.PIN4 91.44,79.164 TB1.6
FLAGSIGNAL: J8.PIN1 TB1.15 | length 9.5
  Top Layer w0.254: TB1.15 J8.PIN1
GND: C1.1 C2.1 C3.1 C4.1 C5.1 C6.1 C7.1 C8.1 D6.C GND.A J1.PIN2 J2.PIN2 J3.PIN2 J4.PIN2 J5.PIN2 J8.PIN2 J9.PIN2 J10.GND R2.1 R3.2 R4.2 R5.2 R6.2 R7.2 R11.2 R12.2 S1.A3 TB1.4 TB1.29 U1.2 U2.1 U2.7 U2.9 U3.1 U3.7 U3.9
LED0: D1.A TB1.20 | length 2.8
  Top Layer w0.254: D1.A 78.376,55.402 78.74,55.766 TB1.20
LED1: D2.A TB1.21 | length 2.7
  Top Layer w0.254: D2.A 81.28,55.498 TB1.21
LED2: D3.A TB1.22 | length 2.7
  Top Layer w0.254: TB1.22 83.82,55.592 D3.A
LED3: D4.A TB1.23 | length 2.9
  Top Layer w0.254: TB1.23 86.36,55.766 86.724,55.402 D4.A
LED4: D5.A TB1.24 | length 3.1
  Top Layer w0.254: TB1.24 88.969,57.97 88.969,55.766 89.332,55.402 D5.A
M1DIR: TB1.13 U2.2 | length 21.4
  Bottom Layer w0.254: U2.2 57.678,63.964 58.396,63.246 64.008,63.246 73.66,72.898 TB1.13
M1OUT1: M1.M U2.6
M1OUT2: M2.M U2.8
M1PWM: TB1.12 U2.3 | length 25.5
  Bottom Layer w0.254: U2.3 56.408,63.964 57.761,62.611 65.325,62.611 75.993,73.279 TB1.12
M2DIR: TB1.9 U3.2 | length 50.9
  Top Layer w0.254: TB1.9 84.116,72.983 84.116,72.348 90.297,66.167 120.65,66.167 v2(123.825,62.992)
  Bottom Layer w0.254: v2(123.825,62.992) 124.968,61.849 126.078,61.849 126.242,62.013 126.275,62.013 127.254,62.992 U3.2
M2OUT1: M3.M U3.6
M2OUT2: M4.M U3.8
M2PWM: TB1.8 U3.3 | length 45.6
  Top Layer w0.254: TB1.8 92.583,67.056 121.285,67.056 125.029,63.312 125.029,63.058 v2(125.095,62.992)
  Bottom Layer w0.254: v2(125.095,62.992) 125.161,63.058 125.542,63.058 125.984,63.5 U3.3
MedidorBateria: C1.2 R1.1 R2.2 TB1.19 | length 25.6
  Top Layer w0.254: v2(49.276,56.388) 72.157,56.388 74.113,54.432
NetC3_2: C3.2 Q1.D U1.1
NetD1_C: D1.C R3.1
NetD2_C: D2.C R7.1
NetD3_C: D3.C R4.1
NetD4_C: D4.C R5.1
NetD5_C: D5.C R6.1
NetD6_A: D6.A R10.1 | length 8.1
  Top Layer w0.254: v1(112.776,47.625) D6.A
  Bottom Layer w0.254: R10.1 106.807,47.625 v1(112.776,47.625)
NetQ1_G: Q1.G R8.2 R9.2
NetR8_1: R8.1 S1.A1 | length 15.7
  Bottom Layer w0.254: R8.1 107.569,65.943 107.569,61.087 113.665,54.991 v1(115.57,54.991)
SEN1: J1.PIN3 TB1.25 | length 10.5
  Bottom Layer w0.254: TB1.25 91.44,57.963 98.781,50.622 J1.PIN3@98.781,50.546
SEN2: J2.PIN3 TB1.26 | length 6.8
  Bottom Layer w0.254: TB1.26 94.276,57.743 94.276,57.108 97.282,54.102 J2.PIN3@98.781,54.102
START: J9.PIN3 TB1.16 | length 8.1
  Bottom Layer w0.254: J9.PIN3 TB1.16
Trig1: J3.PIN3 TB1.11 | length 11.6
  Top Layer w0.254: J3.PIN3 78.74,78.608 TB1.11
Trig2: J4.PIN3 TB1.7 | length 12.6
  Top Layer w0.254: J4.PIN3 88.9,76.322 TB1.7
Trig3: J5.PIN3 TB1.5 | length 11.4
  Top Layer w0.254: J5.PIN3 93.98,79.164 TB1.5
pads on no net: S1.A2 TB1.3 TB1.17 TB1.18 TB1.27 TB1.28

## Polygon pours and split planes (outlines as drawn)
GND on Top Layer "GND_L01_P051" (solid, pour order 51): 128.898,99.568 47.371,99.568 ccw(c47.371,94.869) 42.672,94.869 42.672,46.736 ccw(c46.863,46.736) 46.863,42.545 131.45,42.545 ccw(c131.45,46.722) 135.627,46.731 135.524,92.957 ccw(c128.899,92.943)
NetD6_A on Top Layer "NETD6_A_L01_P049" (solid, pour order 49): 115.316,49.022 112.014,49.022 112.014,46.355 115.316,46.355
5V on Top Layer "Top Layer-5V" (solid, pour order 43): 102.883,59.309 105.156,59.309 105.13,59.318 134.491,59.431 ccw(c134.486,60.708) 135.763,60.708 135.763,87.884 ccw(c134.239,87.884) 134.239,89.408 67.31,89.408 ccw(c67.31,88.9) 66.802,88.9 66.802,87.757 ccw(c67.437,87.757) 67.437,87.122 130.302,87.122 cw(c130.302,84.836) 132.588,84.836 132.588,62.738 cw(c131.572,62.738) 131.572,61.722 95.504,61.722 ccw(c95.504,61.214) 94.996,61.214 94.996,59.817 ccw(c95.504,59.817) 95.504,59.309 96.774,59.309
GND on Top Layer "GND_L01_P034" (solid, pour order 34): 66.802,86.36 66.802,84.201 105.537,84.201 ccw(c105.537,84.709) 106.045,84.709 106.045,86.106 ccw(c105.537,86.106) 105.537,86.614 66.802,86.614
NetR8_1 on Top Layer "NETR8_1_L01_P020" (solid, pour order 20): 111.379,54.483 111.379,55.499 cw(c111.633,55.499) 111.633,55.753 119.507,55.753 cw(c119.507,55.499) 119.761,55.499 119.761,54.483 cw(c119.507,54.483) 119.507,54.229 111.633,54.229 cw(c111.633,54.483)
MedidorBateria on Top Layer "MEDIDORBATERIA_L01_P013" (solid, pour order 13): 75.438,59.055 76.835,59.055 cw(c76.835,58.674) 77.216,58.674 77.216,56.642 cw(c77.089,56.642) 77.089,56.515 ccw(c77.089,56.134) 76.708,56.134 76.708,52.07 cw(c76.2,52.07) 76.2,51.562 72.644,51.562 cw(c72.644,52.07) 72.136,52.07 72.136,56.388 cw(c72.263,56.388) 72.263,56.515 74.422,56.515 ccw(c74.422,57.15) 75.057,57.15 75.057,58.674 cw(c75.438,58.674)
NetD5_C on Top Layer "NETD5_C_L01_P004" (solid, pour order 4): 88.9,53.467 90.424,53.467 cw(c90.424,53.086) 90.805,53.086 90.805,50.419 cw(c90.551,50.419) 90.551,50.165 88.773,50.165 cw(c88.773,50.419) 88.519,50.419 88.519,53.086 cw(c88.9,53.086)
NetD4_C on Top Layer "NETD4_C_L01_P003" (solid, pour order 3): 86.106,53.467 87.63,53.467 cw(c87.63,53.086) 88.011,53.086 88.011,50.419 cw(c87.757,50.419) 87.757,50.165 85.979,50.165 cw(c85.979,50.419) 85.725,50.419 85.725,53.086 cw(c86.106,53.086)
NetD3_C on Top Layer "NETD3_C_L01_P002" (solid, pour order 2): 83.312,53.467 84.836,53.467 cw(c84.836,53.086) 85.217,53.086 85.217,50.419 cw(c84.963,50.419) 84.963,50.165 83.185,50.165 cw(c83.185,50.419) 82.931,50.419 82.931,53.086 cw(c83.312,53.086)
NetD2_C on Top Layer "NETD2_C_L01_P001" (solid, pour order 1): 80.391,53.467 81.915,53.467 cw(c81.915,53.086) 82.296,53.086 82.296,50.419 cw(c82.042,50.419) 82.042,50.165 80.264,50.165 cw(c80.264,50.419) 80.01,50.419 80.01,53.086 cw(c80.391,53.086)
NetD1_C on Top Layer "NETD1_C_L01_P000" (solid, pour order 0): 77.597,53.467 79.121,53.467 cw(c79.121,53.086) 79.502,53.086 79.502,50.419 cw(c79.248,50.419) 79.248,50.165 77.47,50.165 cw(c77.47,50.419) 77.216,50.419 77.216,53.086 cw(c77.597,53.086)
GND on Bottom Layer "Bottom Layer-GND" (solid, pour order 53): 42.799,47.244 ccw(c47.498,47.244) 47.498,42.545 129.921,42.545 ccw(c129.921,48.133) 135.509,48.133 135.509,92.32 ccw(c128.241,92.32) 128.261,99.588 50.661,99.8 ccw(c50.64,91.959) 42.799,91.959
5V on Bottom Layer "Bottom Layer-5V" (solid, pour order 32): 67.31,43.815 ccw(c67.945,43.815) 67.945,43.18 104.648,43.18 ccw(c104.648,43.942) 105.41,43.942 105.41,60.96 ccw(c104.648,60.96) 104.648,61.722 91.567,61.722 cw(c91.567,62.23) 91.059,62.23 91.059,64.262 ccw(c90.551,64.262) 90.551,64.77 87.757,64.77 ccw(c87.757,64.262) 87.249,64.262 87.249,59.817 ccw(c87.757,59.817) 87.757,59.309 102.616,59.309 cw(c102.616,58.928) 102.997,58.928 102.997,47.498 102.997,46.609 cw(c102.362,46.609) 102.362,45.974 67.818,45.974 ccw(c67.818,45.466) 67.31,45.466
BAT on Bottom Layer "Bottom Layer-BAT" (solid, pour order 27): 50.673,67.31 ccw(c50.673,67.691) 51.054,67.691 51.054,68.707 cw(c51.562,68.707) 51.562,69.215 55.245,69.215 ccw(c55.245,69.596) 55.626,69.596 55.626,71.12 ccw(c55.245,71.12) 55.245,71.501 51.689,71.501 cw(c51.689,72.136) 51.054,72.136 51.054,89.662 cw(c53.467,89.662) 53.467,92.075 109.601,92.075 cw(c109.601,89.916) 111.76,89.916 111.76,74.676 cw(c110.49,74.676) 110.49,73.406 106.172,73.406 ccw(c106.172,72.898) 105.664,72.898 105.664,72.644 cw(c104.775,72.644) 104.775,71.755 98.806,71.755 ccw(c98.806,71.247) 98.298,71.247 98.298,67.691 ccw(c98.806,67.691) 98.806,67.183 115.189,67.183 ccw(c115.189,67.691) 115.697,67.691 115.697,68.834 cw(c116.205,68.834) 116.205,69.342 124.841,69.342 ccw(c124.841,69.723) 125.222,69.723 125.222,71.501 ccw(c124.841,71.501) 124.841,71.882 119.761,71.882 cw(c119.761,73.152) 118.491,73.152 118.491,97.409 ccw(c115.824,97.409) 115.824,100.076 48.514,100.076 ccw(c48.514,94.107) 42.545,94.107 42.545,55.372 ccw(c43.307,55.372) 43.307,54.61 46.482,54.61 ccw(c46.482,55.118) 46.99,55.118 46.99,56.642 ccw(c46.482,56.642) 46.482,57.15 45.212,57.15 cw(c45.212,57.785) 44.577,57.785 44.577,66.802 cw(c45.085,66.802) 45.085,67.31 45.492,67.31 45.495,67.32 ccw(c45.593,67.819) 45.593,67.31
M1OUT2 on Bottom Layer "M1OUT2_L02_P006" (solid, pour order 6): 58.547,69.469 58.547,77.47 cw(c59.182,77.47) 59.182,78.105 63.627,78.105 cw(c63.627,77.597) 64.135,77.597 64.135,72.39 cw(c63.627,72.39) 63.627,71.882 59.944,71.882 ccw(c59.944,71.374) 59.436,71.374 59.436,69.469 cw(c59.182,69.469) 59.182,69.215 58.801,69.215 cw(c58.801,69.469)
NetQ1_G on Bottom Layer "NETQ1_G_L02_P037" (solid, pour order 37): 98.552,66.929 106.426,66.929 cw(c106.426,66.675) 106.68,66.675 106.68,65.913 cw(c106.426,65.913) 106.426,65.659 98.552,65.659 cw(c98.552,65.913) 98.298,65.913 98.298,66.675 cw(c98.552,66.675)
M2OUT2 on Bottom Layer "M2OUT2_L02_P030" (solid, pour order 30): 128.778,69.342 128.143,69.342 cw(c128.143,69.596) 127.889,69.596 127.889,71.628 ccw(c127.508,71.628) 127.508,72.009 127.127,72.009 cw(c127.127,72.263) 126.873,72.263 126.873,77.343 cw(c127.635,77.343) 127.635,78.105 132.715,78.105 cw(c132.715,77.47) 133.35,77.47 133.35,72.644 cw(c132.715,72.644) 132.715,72.009 129.667,72.009 ccw(c129.667,71.374) 129.032,71.374 129.032,69.596 cw(c128.778,69.596)
M2OUT1 on Bottom Layer "M2OUT1_L02_P028" (solid, pour order 28): 125.735,69.342 126.238,69.342 ccw(c126.238,69.596) 126.492,69.596 126.492,77.47 ccw(c125.857,77.47) 125.857,78.105 120.523,78.105 ccw(c120.523,77.597) 120.015,77.597 120.015,73.025 ccw(c120.65,73.025) 120.65,72.39 124.698,72.39 cw(c124.698,71.711) 125.376,71.739 125.465,69.601 ccw(c125.735,69.612)
MedidorBateria on Bottom Layer "MEDIDORBATERIA_L02_P017" (solid, pour order 17): 47.434,55.626 49.847,55.626 ccw(c49.847,55.88) 50.102,55.88 50.102,56.642 ccw(c49.721,56.642) 49.72,57.023 47.434,57.023 ccw(c47.434,56.769) 47.18,56.769 47.18,55.88 ccw(c47.434,55.88)
NetC3_2 on Bottom Layer "NETC3_2_L02_P007" (solid, pour order 7): 94.234,70.993 87.757,70.993 ccw(c87.757,70.485) 87.249,70.485 87.249,68.326 ccw(c87.63,68.326) 87.63,67.945 92.075,67.945 cw(c92.075,67.31) 92.71,67.31 92.71,64.008 ccw(c93.091,64.008) 93.091,63.627 94.361,63.627 ccw(c94.361,63.881) 94.615,63.881 94.615,70.612 ccw(c94.234,70.612)
M1OUT1 on Bottom Layer "M1OUT1_L02_P005" (solid, pour order 5): 56.134,69.215 56.642,69.215 ccw(c56.642,69.469) 56.896,69.469 56.896,71.501 cw(c57.277,71.501) 57.277,71.882 57.658,71.882 ccw(c57.658,72.39) 58.166,72.39 58.166,77.47 ccw(c57.531,77.47) 57.531,78.105 52.451,78.105 ccw(c52.451,77.47) 51.816,77.47 51.816,72.517 ccw(c52.451,72.517) 52.451,71.882 55.499,71.882 cw(c55.499,71.501) 55.88,71.501 55.88,69.469 ccw(c56.134,69.469)

## Keep-outs
Keep-Out Layer:
  the board outline again, w0.254

## Other copper
Top Layer:
  pour cut-out: 85.651,74.202 84.529,74.202 84.529,72.485 90.458,66.555 92.83,66.555 92.604,66.781 92.308,66.781 86.856,72.233 86.827,72.204 85.915,72.204 85.285,72.834
  pour cut-out: 73.348,82.326 73.348,81.24 73.568,81.46 75.022,81.46 75.022,80.432 75.444,80.01 76.789,80.01 74.813,81.985
  pour cut-out: 81.222,82.326 81.222,81.24 81.442,81.46 82.896,81.46 82.896,81.061 83.116,80.841 83.116,79.786 84.933,79.786 82.734,81.985 82.687,81.985
  pour cut-out: 89.634,81.616 89.634,81.95 89.669,81.985 90.609,81.985 90.609,81.984 93.726,78.867 93.726,74.041 93.436,74.041 92.826,73.431 93.271,72.986 93.271,72.356 92.149,72.356 92.515,72.722 92.515,73.724 92.474,73.724 91.799,74.399 91.799,79.313
  pour cut-out: 102.986,72.125 102.124,72.125 101.981,72.268 101.981,79.121 103.752,79.121 103.752,74.433
  pour cut-out: 105.722,82.204 105.722,81.118 105.388,81.118 104.931,81.575 104.694,81.338 104.048,81.338 104.048,81.224 103.591,80.767 103.591,80.235 103.88,79.946 103.88,79.242 103.759,79.121 101.981,79.121 101.981,79.588 104.221,81.828 104.318,81.828
  pour cut-out: 124.781,62.522 124.139,62.522 124.139,63.186 120.784,66.541 120.725,66.541 120.725,66.655 120.738,66.668 121.124,66.668 124.584,63.207
Bottom Layer:
  pour cut-out: 51.817,71.887 51.817,71.813 51.764,71.76 51.757,71.767 51.543,71.767 51.313,71.997 51.313,79.243 52.212,78.344 52.226,78.344 52.033,78.151 ccw(c53.072,77.112) 51.603,77.051
  pour cut-out: 124.523,63.095 124.48,63.052 124.389,63.052 ccw(c124.325,63.039) 124.379,63.075 ccw(c124.255,63.051) 124.36,63.121 123.935,63.546 123.715,63.546 123.715,63.326 123.271,62.882 122.555,63.598 122.555,63.627 123.063,63.627 123.374,63.938 123.374,64.001 124.152,64.001 124.593,63.56 125.119,63.56 125.144,63.585
  pour cut-out: 72.517,72.263 71.71,72.263 71.702,72.271 72.128,72.697 72.128,73.861 71.702,74.287 71.702,74.496 71.755,74.549 73.914,74.549 73.914,74.422 72.764,73.272 72.764,72.551
  pour cut-out: 64.135,62.992 64.142,62.999 65.285,62.999 74.295,72.009 74.292,72.012 73.152,72.012
  pour cut-out: 95.123,72.009 94.996,71.882 73.152,71.882 73.152,72.141 73.401,72.39 74.168,72.39 74.168,72.517 74.735,73.084 74.735,73.724 74.217,73.724 73.508,74.433 73.624,74.549 95.123,74.549
  pour cut-out: 102.986,74.433 102.986,72.125 102.947,72.086 102.947,72.014 98.632,72.014 98.607,71.99 97.917,72.68 97.917,74.549
  pour cut-out: 56.094,66.04 55.452,66.04 55.579,65.913 55.579,63.523 55.984,63.523 55.88,63.627 55.88,65.405
  pour cut-out: 57.736,62.491 57.736,62.411 57.689,62.364 57.565,62.364 56.769,63.16 56.769,65.991 56.72,66.04 57.364,66.04 57.364,65.911 57.116,65.664 57.116,63.661 57.29,63.487 57.29,63.099
  pour cut-out: 90.805,59.055 92.075,57.785 92.075,56.769 68.961,56.769 68.961,59.309 87.498,59.309 87.757,59.05 90.639,59.05
  pour cut-out: 99.762,53.155 99.787,53.13 99.787,51.493 98.459,51.493 92.075,57.877 92.075,59.182 93.345,59.182 93.472,59.055 93.091,58.674 93.091,57.761 97.109,53.743 98.022,53.743 98.171,53.594
  pour cut-out: 102.713,58.993 102.743,58.963 102.743,56.769 95.25,56.769 95.123,56.642 94.781,56.984 94.781,59.05 102.656,59.05 102.681,59.025
  pour cut-out: 125.676,66.203 125.022,66.203 125.144,66.08 125.144,63.585 125.263,63.465 125.4,63.465 125.615,63.68 125.615,63.996 125.476,64.135
  pour cut-out: 125.095,62.23 125.984,62.23 127,63.246 127,63.754 126.873,63.754 126.746,63.881 126.746,65.786 127,66.04 127,66.167 126.238,66.167 126.238,66.04 126.492,65.786 126.492,63.881 126.238,63.627 126.238,63.373 125.349,62.484 125.222,62.484 124.968,62.484

## Silkscreen, mask and mechanical layers (free items; w line width, h text height)
Top Overlay:
  drawing of 12 lines, arcs and shapes, not listed
  text "ASIMO" at 46.612,69.715 h4
BoardOutLine:
  the board outline again, w0.254

## Text inside footprints (layer, text, board x,y; h text height)
J10: Top Overlay "GND" at 102.803,86.36 h1 r270; Top Overlay "TX" at 102.864,83.49 h1 r270; Top Overlay "RX" at 102.813,80.924 h1 r270; Top Overlay "5V" at 102.813,88.544 h1 r270